# EAGLE board ATTinyPanel (EAGLE 6.4)
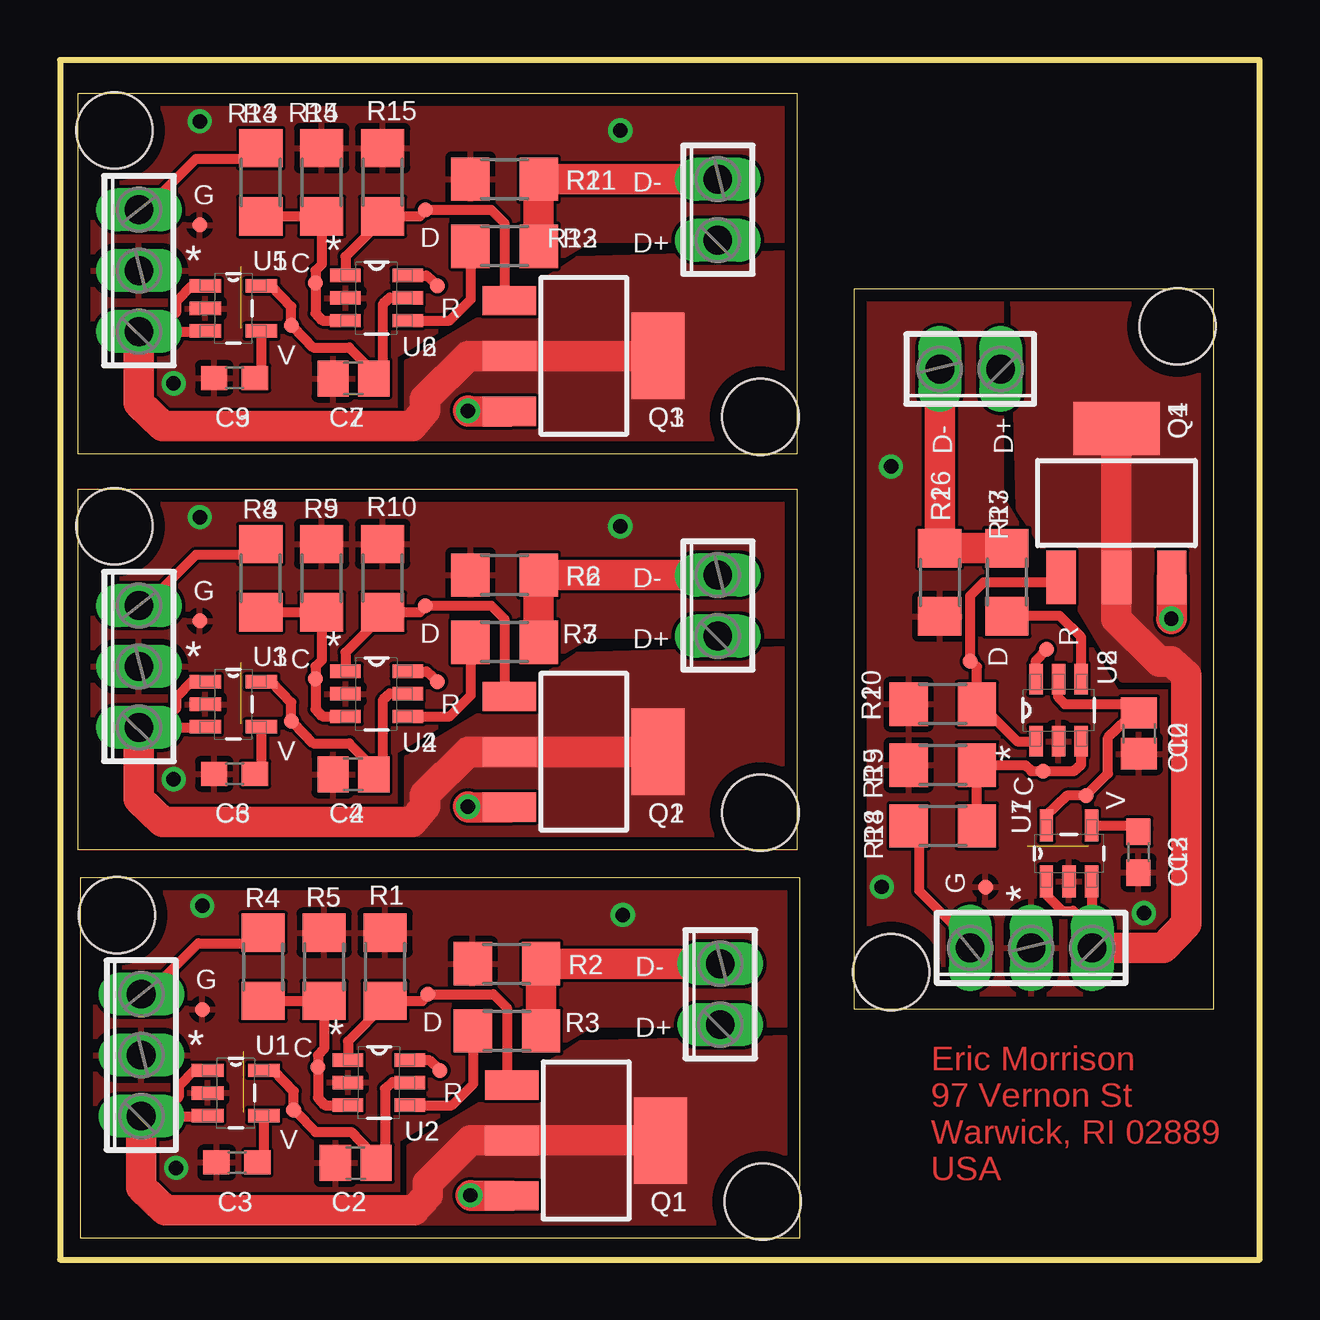
[diagram p0: board, top side]
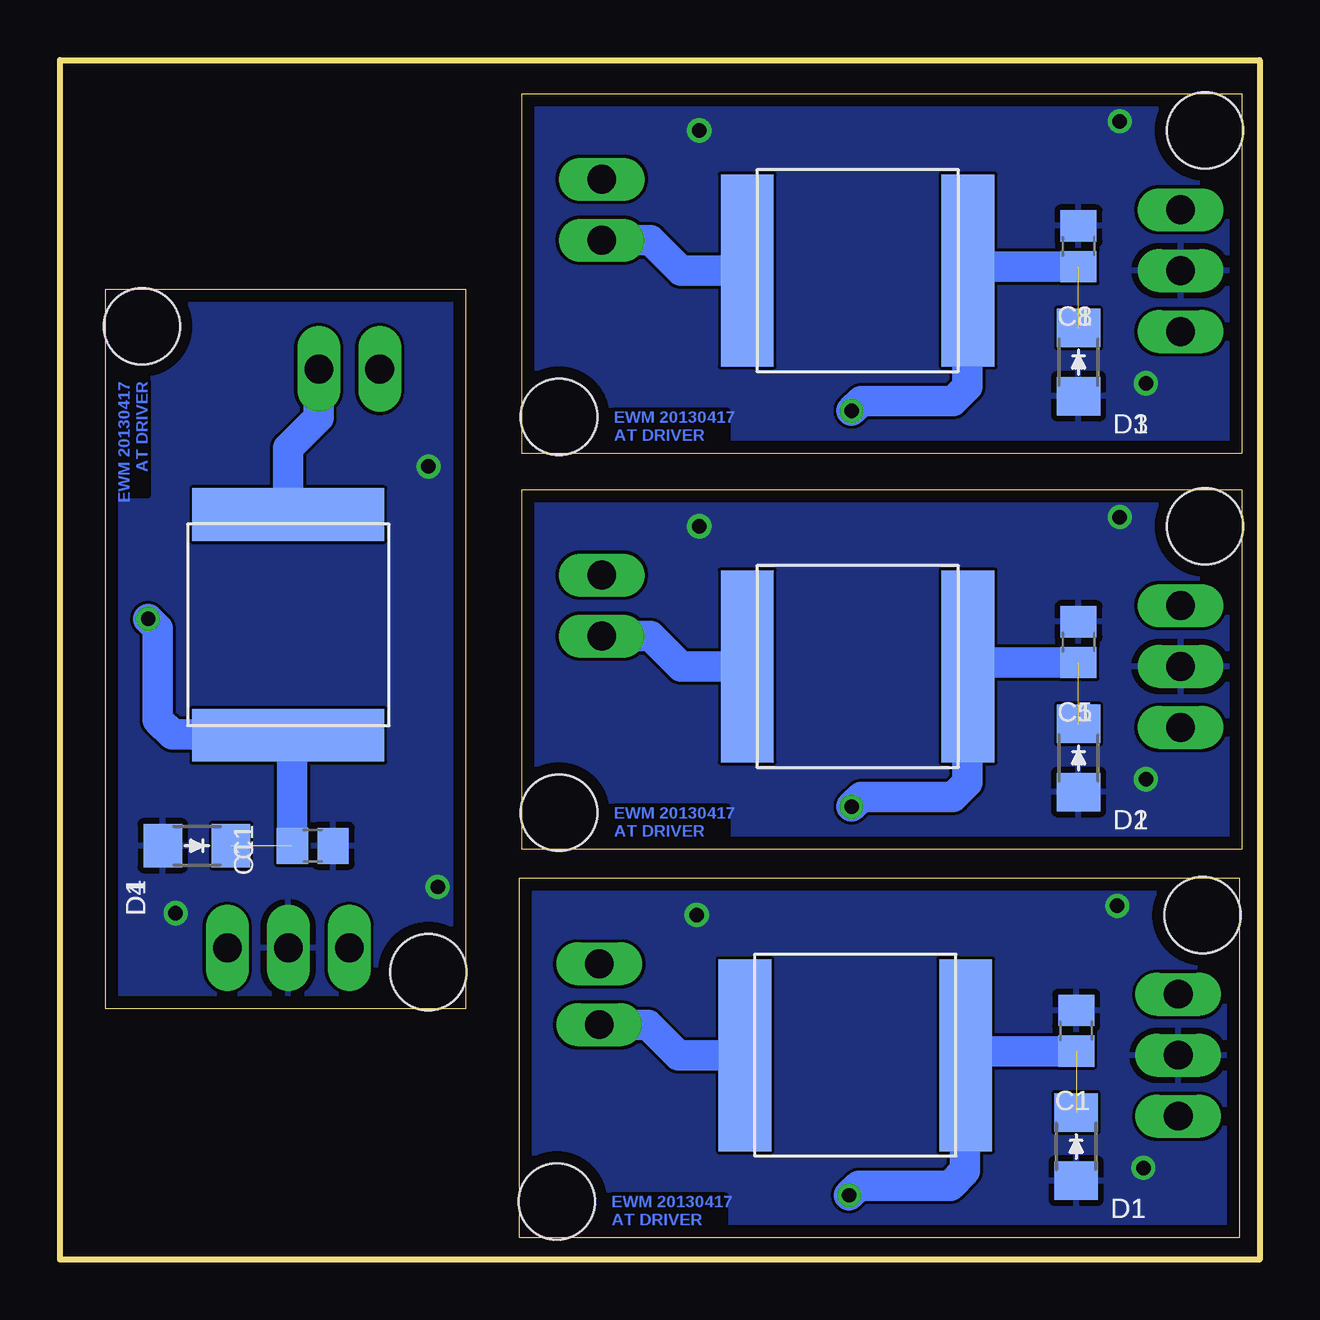
[diagram p1: board, bottom side, seen from below]

Size 50 x 50 mm. Coordinates in mm from the lower left corner, seen from the top.
Outline: 0.85,0.9 30.85,0.9 30.85,15.9 0.85,15.9 0.85,0.9
Outline: 0,0 50,0 50,50 0,50 0,0
Outline: 0.75,17.1 30.75,17.1 30.75,32.1 0.75,32.1 0.75,17.1
Outline: 0.75,33.6 30.75,33.6 30.75,48.6 0.75,48.6 0.75,33.6
Outline: 48.1,10.45 48.1,40.45 33.1,40.45 33.1,10.45 48.1,10.45
Copper layers (1*16): Top 0.035mm / dielectric 1.5mm / Bottom 0.035mm
Design rules "default *": minimum track width 10mil, minimum drill 10mil, track to track 5mil, track to pad 5mil, pad to pad 5mil, via to via 5mil, smd to smd 0mil, copper to edge 20mil, drill to drill 5mil, minimum pad ring 10mil, minimum via ring 8mil, stop-mask expansion 4mil, vias tented up to drill 0mil, thermal gap 10mil
Holes 3.17 mm at 2.37,14.36 29.3,2.42 2.27,30.56 29.2,18.62 2.27,47.06 29.2,35.12 34.64,11.97 46.58,38.9

## Footprints (pad centres in the part's own frame; a part is rotated, then mirrored left to right if it is on the bottom)
TPI_PAD = smd 0.635 x 0.635: P$1 0,0
C0805 = smd 1.3 x 1.5: 1 -0.85,0; 2 0.85,0
C0603 = smd 1.1 x 1: 1 -0.85,0; 2 0.85,0
D1206 = smd 1.6 x 1.803: 1 -1.422,0; 2 1.422,0
SRN8040 = smd 2.2 x 8: P$1 -4.6,0; P$2 4.6,0
SOT223 = smd 1.219 x 2.235: 1 -2.311,-3.099; 2 0,-3.099; 3 2.311,-3.099 | smd 3.6 x 2.2: TAB 0,3.099
R1206 = smd 1.6 x 1.803: 1 -1.422,0; 2 1.422,0
SOT95P280X145-5N = smd 1.321 x 0.559: 1 -1.168,0.94; 2 -1.168,0; 3 -1.168,-0.94; 4 1.168,-0.94; 5 1.168,0.94
SOT95P280X145-6N = smd 1.27 x 0.559: 1 -1.295,0.94; 2 -1.295,0; 3 -1.295,-0.94; 4 1.295,-0.94; 5 1.295,0; 6 1.295,0.94
2POL254 = drill 1.2 long: 1 -1.27,0; 2 1.27,0
3POL254 = drill 1.2 long: 1 -2.54,0; 2 0,0; 3 2.54,0

## Placement (x,y rotation side)
+5V  TPI  [TPI_PAD]  9.74,6.23 0 top
+5V1  TPI  [TPI_PAD]  9.64,22.43 0 top
+5V2  TPI  [TPI_PAD]  9.64,38.93 0 top
+5V3  TPI  [TPI_PAD]  42.77,19.34 90 top
C1  .1u  [C0805]  7.65,9.53 90 bottom
C2  .1u  [C0805]  12.33,4.02 180 top
C3  10n  [C0603]  7.38,4.05 180 top
C4  .1u  [C0805]  12.23,20.22 180 top
C5  .1u  [C0805]  7.55,25.73 90 bottom
C6  10n  [C0603]  7.28,20.25 180 top
C7  .1u  [C0805]  12.23,36.72 180 top
C8  .1u  [C0805]  7.55,42.23 90 bottom
C9  10n  [C0603]  7.28,36.75 180 top
C10  .1u  [C0805]  44.98,21.93 270 top
C11  .1u  [C0805]  39.47,17.25 0 bottom
C12  10n  [C0603]  44.95,16.98 270 top
D1  CD1206-B260  [D1206]  7.65,4.71 270 bottom
D2  CD1206-B260  [D1206]  7.55,20.91 270 bottom
D3  CD1206-B260  [D1206]  7.55,37.41 270 bottom
D4  CD1206-B260  [D1206]  44.29,17.25 180 bottom
GND  TPI  [TPI_PAD]  5.93,10.42 0 top
GND1  TPI  [TPI_PAD]  5.83,26.62 0 top
GND2  TPI  [TPI_PAD]  5.83,43.12 0 top
GND3  TPI  [TPI_PAD]  38.58,15.53 90 top
L1  SRN8040  [SRN8040]  16.85,8.52 180 bottom
L2  SRN8040  [SRN8040]  16.75,24.72 180 bottom
L3  SRN8040  [SRN8040]  16.75,41.22 180 bottom
L4  SRN8040  [SRN8040]  40.48,26.45 90 bottom
Q1  BSP100  [SOT223]  21.93,4.96 270 top
Q2  BSP100  [SOT223]  21.83,21.16 270 top
Q3  BSP100  [SOT223]  21.83,37.66 270 top
Q4  BSP100  [SOT223]  44.04,31.53 0 top
R1  10k  [R1206]  13.55,12.2 270 top
R2  1  [R1206]  18.63,12.33 0 top
R3  10k  [R1206]  18.63,9.53 180 top
R4  900  [R1206]  8.47,12.2 90 top
R5  300  [R1206]  11.01,12.2 90 top
R6  1  [R1206]  18.53,28.53 0 top
R7  10k  [R1206]  18.53,25.73 180 top
R8  900  [R1206]  8.37,28.4 90 top
R9  300  [R1206]  10.91,28.4 90 top
R10  10k  [R1206]  13.45,28.4 270 top
R11  1  [R1206]  18.53,45.03 0 top
R12  10k  [R1206]  18.53,42.23 180 top
R13  900  [R1206]  8.37,44.9 90 top
R14  300  [R1206]  10.91,44.9 90 top
R15  10k  [R1206]  13.45,44.9 270 top
R16  1  [R1206]  36.67,28.23 90 top
R17  10k  [R1206]  39.47,28.23 270 top
R18  900  [R1206]  36.8,18.07 180 top
R19  300  [R1206]  36.8,20.61 180 top
R20  10k  [R1206]  36.8,23.15 0 top
RESET  TPI  [TPI_PAD]  15.84,7.88 0 top
RESET1  TPI  [TPI_PAD]  15.74,24.08 0 top
RESET2  TPI  [TPI_PAD]  15.74,40.58 0 top
RESET3  TPI  [TPI_PAD]  41.12,25.44 90 top
TPICLK  TPI  [TPI_PAD]  10.76,8.01 0 top
TPICLK1  TPI  [TPI_PAD]  10.66,24.21 0 top
TPICLK2  TPI  [TPI_PAD]  10.66,40.71 0 top
TPICLK3  TPI  [TPI_PAD]  40.99,20.36 90 top
TPIDATA  TPI  [TPI_PAD]  15.33,11.06 0 top
TPIDATA1  TPI  [TPI_PAD]  15.23,27.26 0 top
TPIDATA2  TPI  [TPI_PAD]  15.23,43.76 0 top
TPIDATA3  TPI  [TPI_PAD]  37.94,24.93 90 top
U1  SPX5205M5-L-3-3  [SOT95P280X145-5N]  7.33,6.94 0 top
U2  ATTINY5-TSHR  [SOT95P280X145-6N]  13.3,7.38 0 top
U3  SPX5205M5-L-3-3  [SOT95P280X145-5N]  7.23,23.14 0 top
U4  ATTINY5-TSHR  [SOT95P280X145-6N]  13.2,23.58 0 top
U5  SPX5205M5-L-3-3  [SOT95P280X145-5N]  7.23,39.64 0 top
U6  ATTINY5-TSHR  [SOT95P280X145-6N]  13.2,40.08 0 top
U7  SPX5205M5-L-3-3  [SOT95P280X145-5N]  42.06,16.93 90 top
U8  ATTINY5-TSHR  [SOT95P280X145-6N]  41.62,22.9 90 top
X1  DIODES  [2POL254]  27.52,11.06 90 top
X2  INPUT  [3POL254]  3.39,8.52 90 top
X3  INPUT  [3POL254]  3.29,24.72 90 top
X4  DIODES  [2POL254]  27.42,27.26 90 top
X5  INPUT  [3POL254]  3.29,41.22 90 top
X6  DIODES  [2POL254]  27.42,43.76 90 top
X7  INPUT  [3POL254]  40.48,12.99 180 top
X8  DIODES  [2POL254]  37.94,37.12 180 top

## Library data of the parts
+5V +5V1-+5V3 D1-D4 GND GND1-GND3 L1-L4 Q1-Q4 RESET RESET1-RESET3 TPICLK TPICLK1-TPICLK3 TPIDATA TPIDATA1-TPIDATA3 = Personal
C1-C12 R1-R20 = resistor
U1 U3 U5 U7 = Exar_By_element14_Batch_1; MPN: SPX5205M5-L-3-3; OC_FARNELL: 1831954; OC_NEWARK: 23R9851; PACKAGE: SOT-23-5; SUPPLIER: EXAR
U2 U4 U6 U8 = Atmel_By_element14_Batch_1; DESCRIPTION: Microcontroller; MPN: ATTINY5-TSHR; OC_FARNELL: 1841626; OC_NEWARK: 12T1342; PACKAGE: SOT563-6; SUPPLIER: ATMEL
X1-X8 = con-phoenix-254; OC_FARNELL: unknown; OC_NEWARK: unknown

## Nets
+14V: Q1.2 Q1.TAB U1.1 U1.3 X2.1
+14V1: Q2.2 Q2.TAB U3.1 U3.3 X3.1
+14V2: Q3.2 Q3.TAB U5.1 U5.3 X5.1
+14V3: Q4.2 Q4.TAB U7.1 U7.3 X7.1
BLINK: R4.1 R5.1 TPICLK.P$1 U2.3
BLINK1: R8.1 R9.1 TPICLK1.P$1 U4.3
BLINK2: R13.1 R14.1 TPICLK2.P$1 U6.3
BLINK3: R18.1 R19.1 TPICLK3.P$1 U8.3
D-: R2.2 R3.1 X1.2
D-1: R6.2 R7.1 X4.2
D-2: R11.2 R12.1 X6.2
D-3: R16.2 R17.1 X8.2
GND: C1.2 C2.2 C3.2 D1.2 GND.P$1 R1.1 R2.1 R5.2 U1.2 U2.2 X2.2
GND1: C4.2 C5.2 C6.2 D2.2 GND1.P$1 R6.1 R9.2 R10.1 U3.2 U4.2 X3.2
GND2: C7.2 C8.2 C9.2 D3.2 GND2.P$1 R11.1 R14.2 R15.1 U5.2 U6.2 X5.2
GND3: C10.2 C11.2 C12.2 D4.2 GND3.P$1 R16.1 R19.2 R20.1 U7.2 U8.2 X7.2
L+: C1.1 D1.1 L1.P$1 Q1.3
L+1: C5.1 D2.1 L2.P$1 Q2.3
L+2: C8.1 D3.1 L3.P$1 Q3.3
L+3: C11.1 D4.1 L4.P$1 Q4.3
MEASURE: R3.2 U2.4
MEASURE1: R7.2 U4.4
MEASURE2: R12.2 U6.4
MEASURE3: R17.2 U8.4
MOSFET: Q1.1 R1.2 TPIDATA.P$1 U2.1
MOSFET1: Q2.1 R10.2 TPIDATA1.P$1 U4.1
MOSFET2: Q3.1 R15.2 TPIDATA2.P$1 U6.1
MOSFET3: Q4.1 R20.2 TPIDATA3.P$1 U8.1
N$1: R4.2 X2.3
N$2: C3.1 U1.4
N$3: L1.P$2 X1.1
N$4: L2.P$2 X4.1
N$5: R8.2 X3.3
N$6: C6.1 U3.4
N$7: L3.P$2 X6.1
N$8: R13.2 X5.3
N$9: C9.1 U5.4
N$10: L4.P$2 X8.1
N$11: R18.2 X7.3
N$12: C12.1 U7.4
RESET: RESET.P$1 U2.6
RESET1: RESET1.P$1 U4.6
RESET2: RESET2.P$1 U6.6
RESET3: RESET3.P$1 U8.6
VCC: +5V.P$1 C2.1 U1.5 U2.5
VCC1: +5V1.P$1 C4.1 U3.5 U4.5
VCC2: +5V2.P$1 C7.1 U5.5 U6.5
VCC3: +5V3.P$1 C10.1 U7.5 U8.5

## Tracks (layer width: path | path; a pad name or v marks a point on that pad's centre or on a via)
+14V
  Top 0.406: X2.1 4.15,5.98 | 4.15,5.98 6.13,5.98 U1.3 | U1.1 5.6,7.88 4.94,7.22 4.94,6.77 4.15,5.98
  Top 1.27: X2.1 3.39,3.01 4.38,2.04 14.77,2.04 15.33,2.68 15.33,3.19 17.11,4.96 Q1.2 Q1.TAB
  pour Top: 14.57,4.71 20.92,8.52 21.68,9.03 31.33,9.28 31.33,0.14 14.57,0.14
+14V1
  Top 0.406: X3.1 4.05,22.18 | 4.05,22.18 6.03,22.18 U3.3 | U3.1 5.5,24.08 4.84,23.42 4.84,22.97 4.05,22.18
  Top 1.27: X3.1 3.29,19.21 4.28,18.24 14.67,18.24 15.23,18.88 15.23,19.39 17.01,21.16 Q2.2 Q2.TAB
  pour Top: 14.47,20.91 20.82,24.72 21.58,25.23 31.23,25.48 31.23,16.34 14.47,16.34
+14V2
  Top 0.406: X5.1 4.05,38.68 | 4.05,38.68 6.03,38.68 U5.3 | U5.1 5.5,40.58 4.84,39.92 4.84,39.47 4.05,38.68
  Top 1.27: X5.1 3.29,35.71 4.28,34.74 14.67,34.74 15.23,35.38 15.23,35.88 17.01,37.66 Q3.2 Q3.TAB
  pour Top: 14.47,37.41 20.82,41.22 21.58,41.73 31.23,41.98 31.23,32.84 14.47,32.84
+14V3
  Top 0.406: X7.1 43.02,13.75 | 43.02,13.75 43.02,15.73 U7.3 | U7.1 41.12,15.2 41.78,14.54 42.23,14.54 43.02,13.75
  Top 1.27: X7.1 45.99,12.99 46.96,13.98 46.96,24.37 46.32,24.93 45.81,24.93 44.04,26.71 Q4.2 Q4.TAB
  pour Top: 44.29,24.17 40.48,30.52 39.97,31.28 39.72,40.93 48.86,40.93 48.86,24.17
BLINK
  Top 0.406: R4.1 R5.1 11.01,8.77 10.76,8.52 TPICLK.P$1 10.76,6.74 11.04,6.44 U2.3
BLINK1
  Top 0.406: R8.1 R9.1 10.91,24.97 10.66,24.72 TPICLK1.P$1 10.66,22.94 10.94,22.64 U4.3
BLINK2
  Top 0.406: R13.1 R14.1 10.91,41.47 10.66,41.22 TPICLK2.P$1 10.66,39.44 10.94,39.14 U6.3
BLINK3
  Top 0.406: R18.1 R19.1 40.23,20.61 40.48,20.36 TPICLK3.P$1 42.26,20.36 42.56,20.64 U8.3
D-
  Top 1.27: X1.2 R2.2 R3.1
D-1
  Top 1.27: X4.2 R6.2 R7.1
D-2
  Top 1.27: X6.2 R11.2 R12.1
D-3
  Top 1.27: X8.2 R16.2 R17.1
GND  (via drill 0.6)
  other vias: 4.84,3.82 5.93,14.74 23.46,14.36
  pour Top: 0.33,16.71 31.33,16.71 31.33,9.79 22.19,9.79 14.06,4.96 14.06,0.14 0.48,0.18
  pour Bottom: 0.58,16.4 31.15,16.4 31.1,0.47 0.62,0.37
GND1  (via drill 0.6)
  other vias: 4.74,20.02 5.83,30.94 23.36,30.56
  pour Top: 0.23,32.91 31.23,32.91 31.23,25.99 22.09,25.99 13.96,21.16 13.96,16.34 0.38,16.38
  pour Bottom: 0.48,32.6 31.05,32.6 31,16.67 0.52,16.57
GND2  (via drill 0.6)
  other vias: 4.74,36.52 5.83,47.44 23.36,47.06
  pour Top: 0.23,49.41 31.23,49.41 31.23,42.49 22.09,42.49 13.96,37.66 13.96,32.84 0.38,32.88
  pour Bottom: 0.48,49.1 31.05,49.1 31,33.17 0.52,33.07
GND3  (via drill 0.6)
  other vias: 45.18,14.44 34.26,15.53 34.64,33.06
  pour Top: 32.29,9.93 32.29,40.93 39.21,40.93 39.21,31.79 44.04,23.66 48.86,23.66 48.82,10.08
  pour Bottom: 32.6,10.18 32.6,40.75 48.53,40.7 48.63,10.22
L+  (via drill 0.6)  (1 unrouted)
  Top 1.27: Q1.3 17.13,2.65 v17.11,2.68
  Bottom 1.27: v17.11,2.68 16.7,3.08 12.89,3.08 12.28,3.69 12.28,8.49 L1.P$1 12.09,8.69 C1.1
L+1  (via drill 0.6)  (1 unrouted)
  Top 1.27: Q2.3 17.03,18.85 v17.01,18.88
  Bottom 1.27: v17.01,18.88 16.6,19.28 12.79,19.28 12.18,19.89 12.18,24.69 L2.P$1 11.99,24.89 C5.1
L+2  (via drill 0.6)  (1 unrouted)
  Top 1.27: Q3.3 17.03,35.35 v17.01,35.38
  Bottom 1.27: v17.01,35.38 16.6,35.78 12.79,35.78 12.18,36.39 12.18,41.19 L3.P$1 11.99,41.38 C8.1
L+3  (via drill 0.6)  (1 unrouted)
  Top 1.27: Q4.3 46.35,26.73 v46.32,26.71
  Bottom 1.27: v46.32,26.71 45.92,26.3 45.92,22.49 45.31,21.88 40.51,21.88 L4.P$1 40.31,21.69 C11.1
MEASURE
  Top 0.406: U2.4 16.34,6.44 17.23,7.33 17.23,9.51 R3.2
MEASURE1
  Top 0.406: U4.4 16.24,22.64 17.13,23.52 17.13,25.71 R7.2
MEASURE2
  Top 0.406: U6.4 16.24,39.14 17.13,40.02 17.13,42.21 R12.2
MEASURE3
  Top 0.406: U8.4 42.56,25.94 41.67,26.83 39.49,26.83 R17.2
MOSFET
  Top 0.406: U2.1 12,9.1 13.55,10.65 R1.2 15.1,10.78 TPIDATA.P$1 18.07,11.06 18.63,10.5 18.63,7.48 Q1.1
MOSFET1
  Top 0.406: U4.1 11.9,25.3 13.45,26.85 R10.2 15,26.98 TPIDATA1.P$1 17.97,27.26 18.53,26.7 18.53,23.68 Q2.1
MOSFET2
  Top 0.406: U6.1 11.9,41.8 13.45,43.35 R15.2 15,43.48 TPIDATA2.P$1 17.97,43.76 18.53,43.2 18.53,40.18 Q3.1
MOSFET3
  Top 0.406: U8.1 39.9,21.6 38.35,23.15 R20.2 38.22,24.7 TPIDATA3.P$1 37.94,27.67 38.5,28.23 41.52,28.23 Q4.1
N$1
  Top 0.406: X2.3 3.64,11.06 5.77,13.18 8.47,13.18 R4.2
N$2
  Top 0.406: 8.37,3.76 C3.1 8.49,4.32 U1.4
N$3
  Bottom 1.27: X1.1 25.49,9.79 24.22,8.52 L1.P$2
N$4
  Bottom 1.27: X4.1 25.39,25.99 24.12,24.72 L2.P$2
N$5
  Top 0.406: X3.3 3.54,27.26 5.67,29.38 8.37,29.38 R8.2
N$6
  Top 0.406: 8.27,19.96 C6.1 8.39,20.52 U3.4
N$7
  Bottom 1.27: X6.1 25.39,42.49 24.12,41.22 L3.P$2
N$8
  Top 0.406: X5.3 3.54,43.76 5.67,45.88 8.37,45.88 R13.2
N$9
  Top 0.406: 8.27,36.46 C9.1 8.39,37.02 U5.4
N$10
  Bottom 1.27: X8.1 39.21,35.09 40.48,33.82 L4.P$2
N$11
  Top 0.406: X7.3 37.94,13.24 35.82,15.37 35.82,18.07 R18.2
N$12
  Top 0.406: 45.24,17.97 C12.1 44.68,18.09 U7.4
RESET
  Top 0.406: U2.6 15.38,8.32 RESET.P$1
RESET1
  Top 0.406: U4.6 15.28,24.52 RESET1.P$1
RESET2
  Top 0.406: U6.6 15.28,41.02 RESET2.P$1
RESET3
  Top 0.406: U8.6 40.68,24.98 RESET3.P$1
VCC
  Top 0.406: U2.5 13.85,7.4 13.55,7.12 13.55,4.11 C2.1 12.91,4.29 12.91,4.53 12.15,5.32 10.65,5.32 9.82,6.18 +5V.P$1 9.74,7.02 8.9,7.88 U1.5
VCC1
  Top 0.406: U4.5 13.75,23.6 13.45,23.32 13.45,20.31 C4.1 12.81,20.49 12.81,20.73 12.05,21.52 10.55,21.52 9.72,22.38 +5V1.P$1 9.64,23.22 8.8,24.08 U3.5
VCC2
  Top 0.406: U6.5 13.75,40.1 13.45,39.82 13.45,36.81 C7.1 12.81,36.99 12.81,37.23 12.05,38.02 10.55,38.02 9.72,38.88 +5V2.P$1 9.64,39.72 8.8,40.58 U5.5
VCC3
  Top 0.406: U8.5 41.6,23.45 41.88,23.15 44.89,23.15 C10.1 44.71,22.52 44.47,22.52 43.68,21.75 43.68,20.25 42.82,19.42 +5V3.P$1 41.98,19.34 41.12,18.5 U7.5

## Text on the board
Top: Eric Morrison / 97 Vernon St / Warwick, RI 02889 / USA
Bottom: EWM 20130417 / AT DRIVER | EWM 20130417 / AT DRIVER | EWM 20130417 / AT DRIVER | EWM 20130417 / AT DRIVER
tNames: D- | G | D | D+ | C | R | V | D- | D+ | D- | G | D | R | C | D+ | D | R | V | C | V | G | D- | G | D | D+ | C | R | V
_tNames: R4 | R5 | R1 | R2 | R3 | U1 | U2 | C3 | C2 | Q1 | Q1 | R4 | R5 | R3 | R1 | R2 | R2 | R3 | U1 | U2 | R1 | C2 | U2 | R5 | C3 | C2 | R4 | Q1 | U1 | C3 | R4 | R5 | R1 | R2 | R3 | U1 | U2 | C3 | C2 | Q1
_bNames: C1 | D1 | C1 | D1 | C1 | D1 | C1 | D1